# Altium PCB Weather PCB ROUTING.PcbDoc
Units mil, origin at the board's own origin, x right, y up, seen from the top; angles counter-clockwise.
Board outline 6000 x 4000 mil, 4 copper layers (Top Layer, GND1, GND2, Bottom Layer), stack 30.635 mil thick; 74 components, 33 nets, 230 pads, 115 vias.
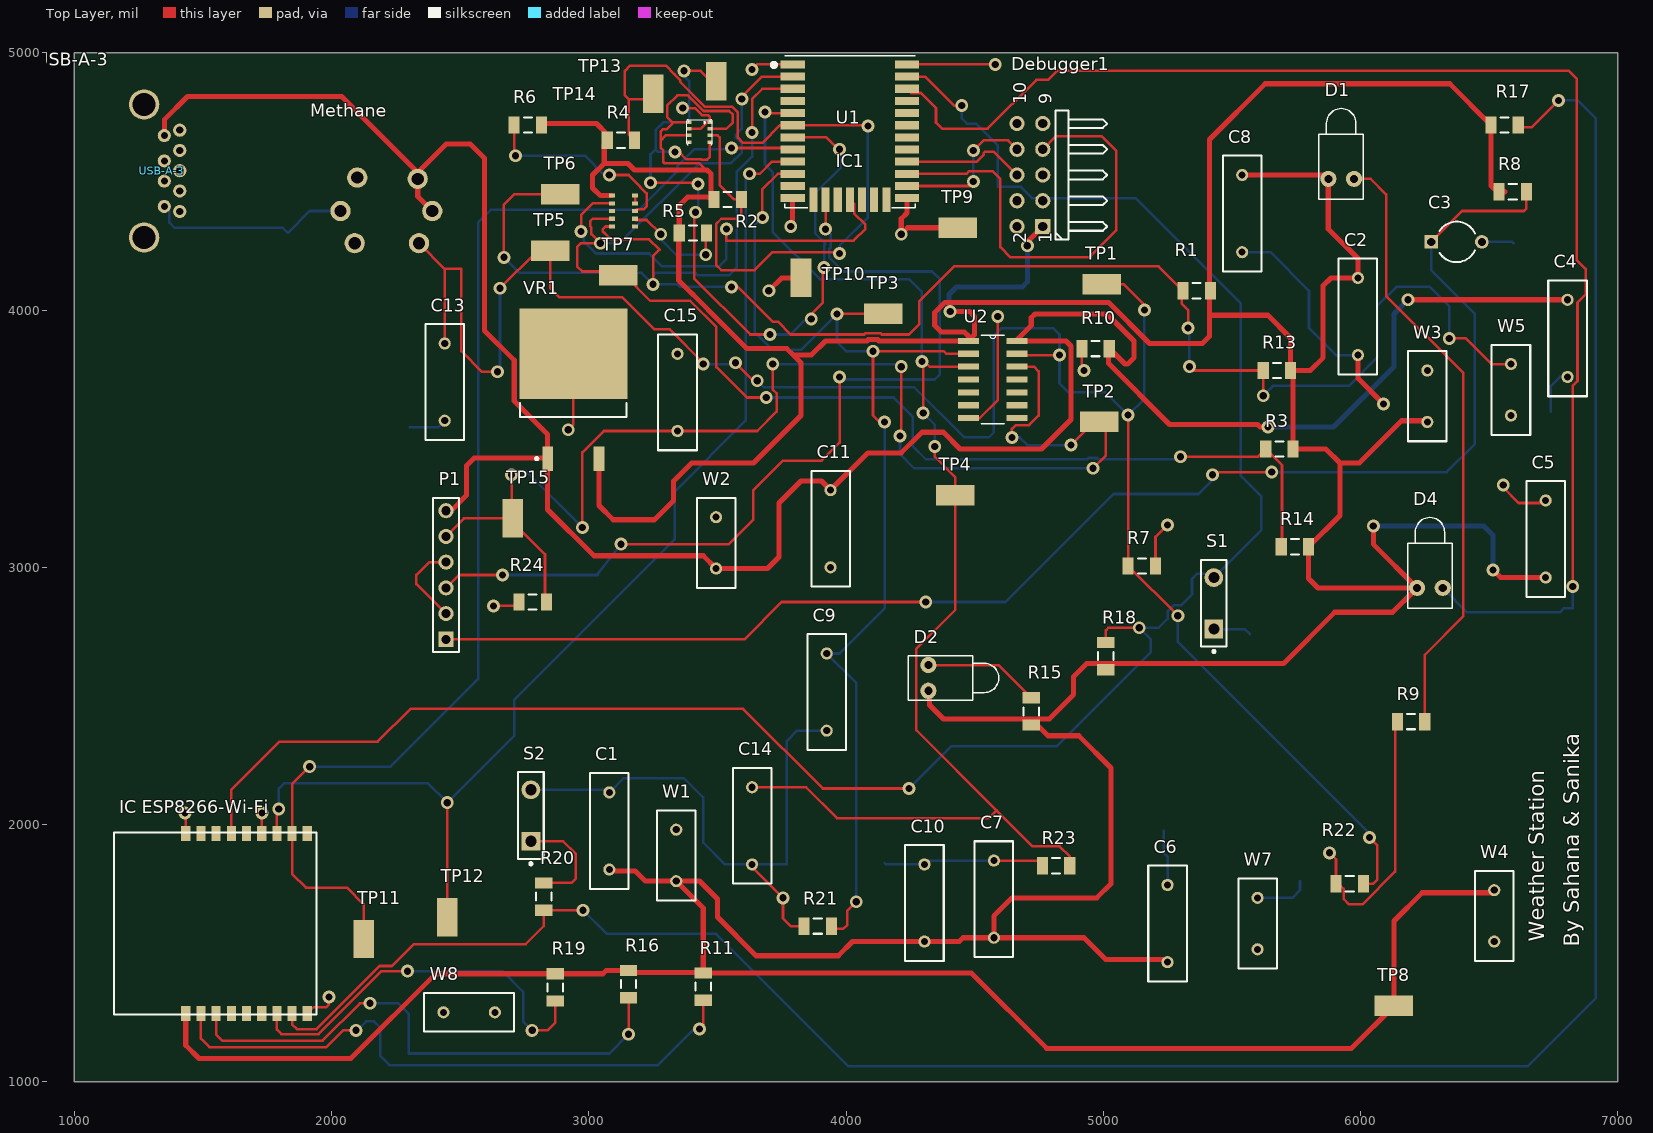
[diagram p0: Top Layer view]
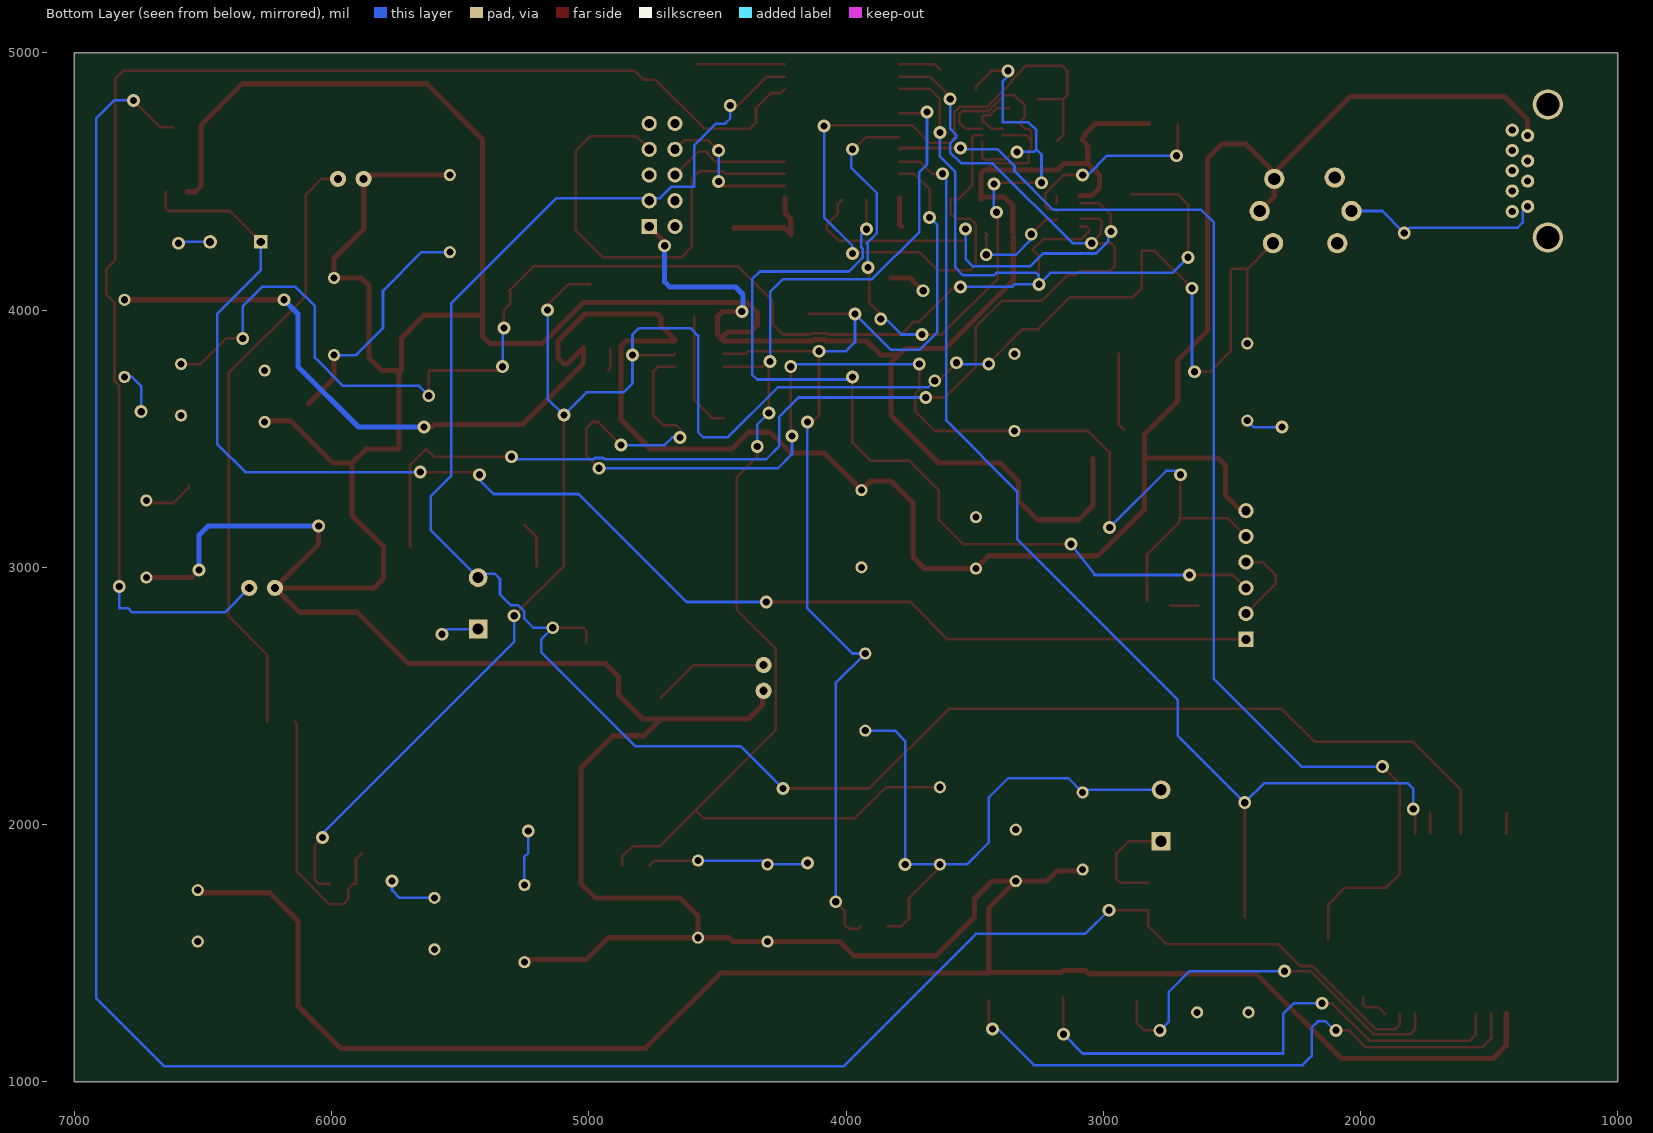
[diagram p1: Bottom Layer view, seen from below]
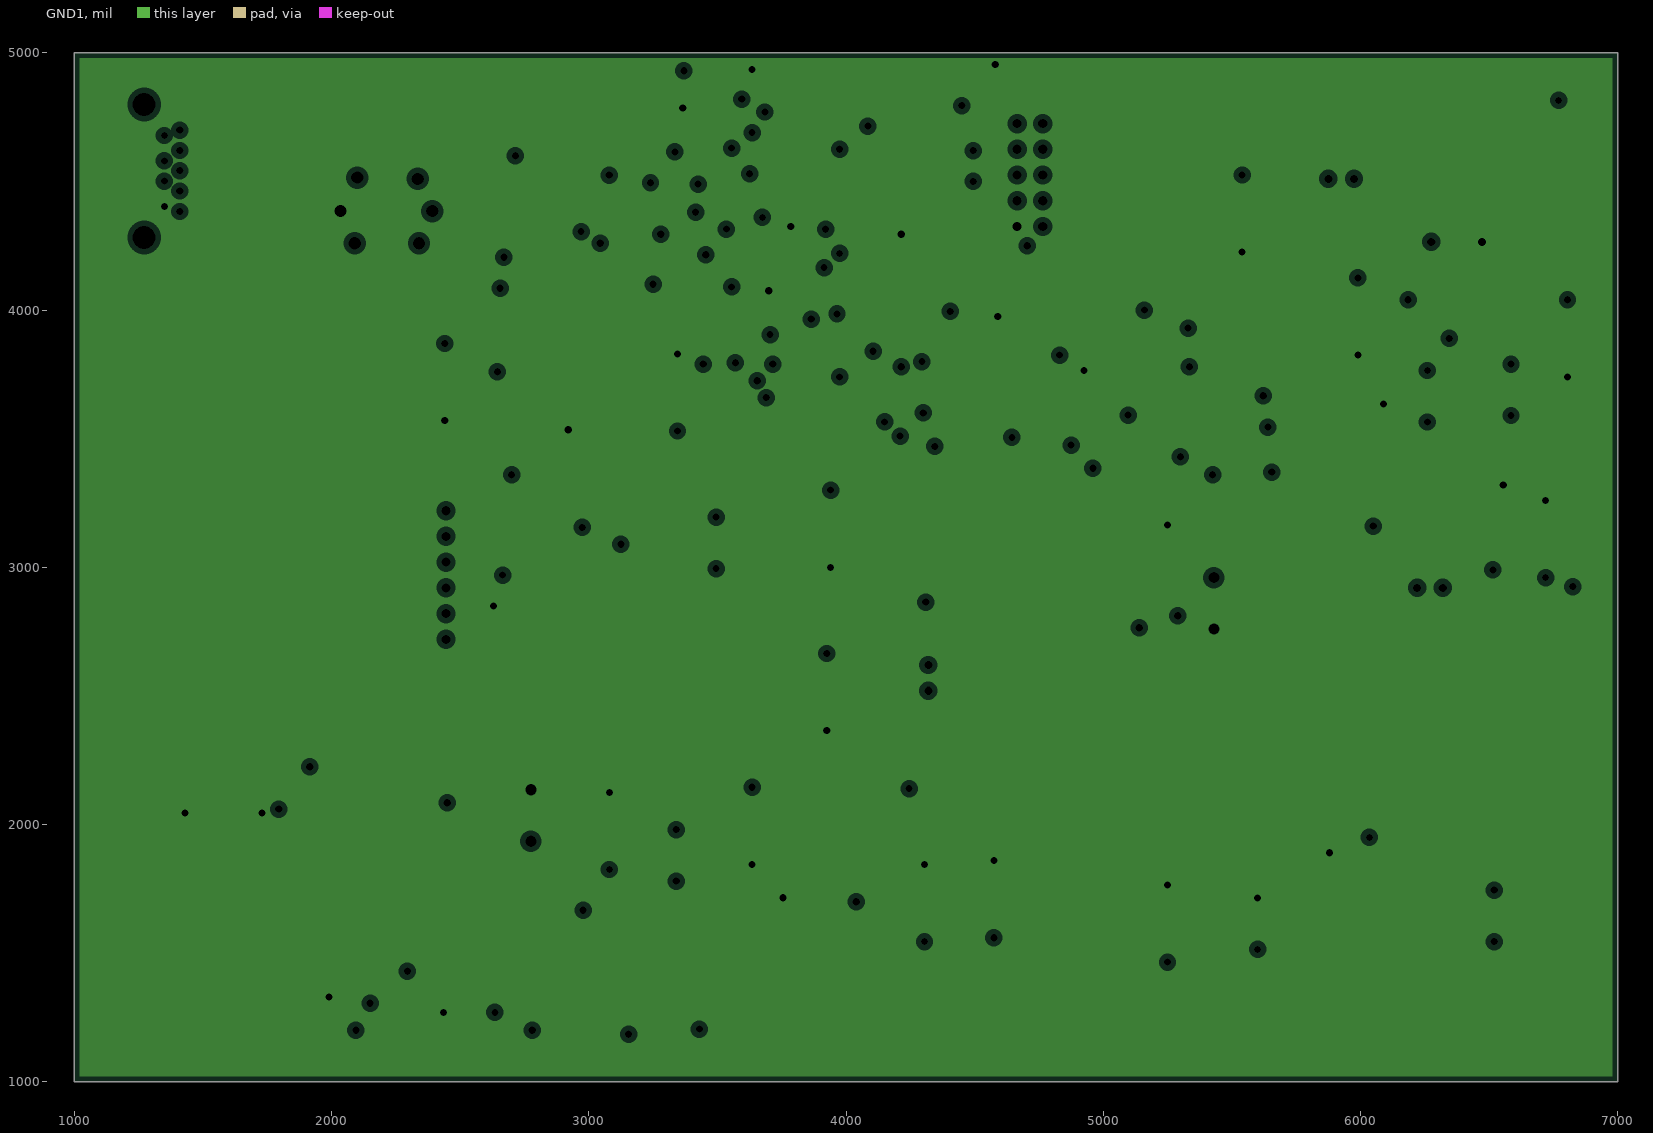
[diagram p2: GND1, clearances drawn from the general rule]
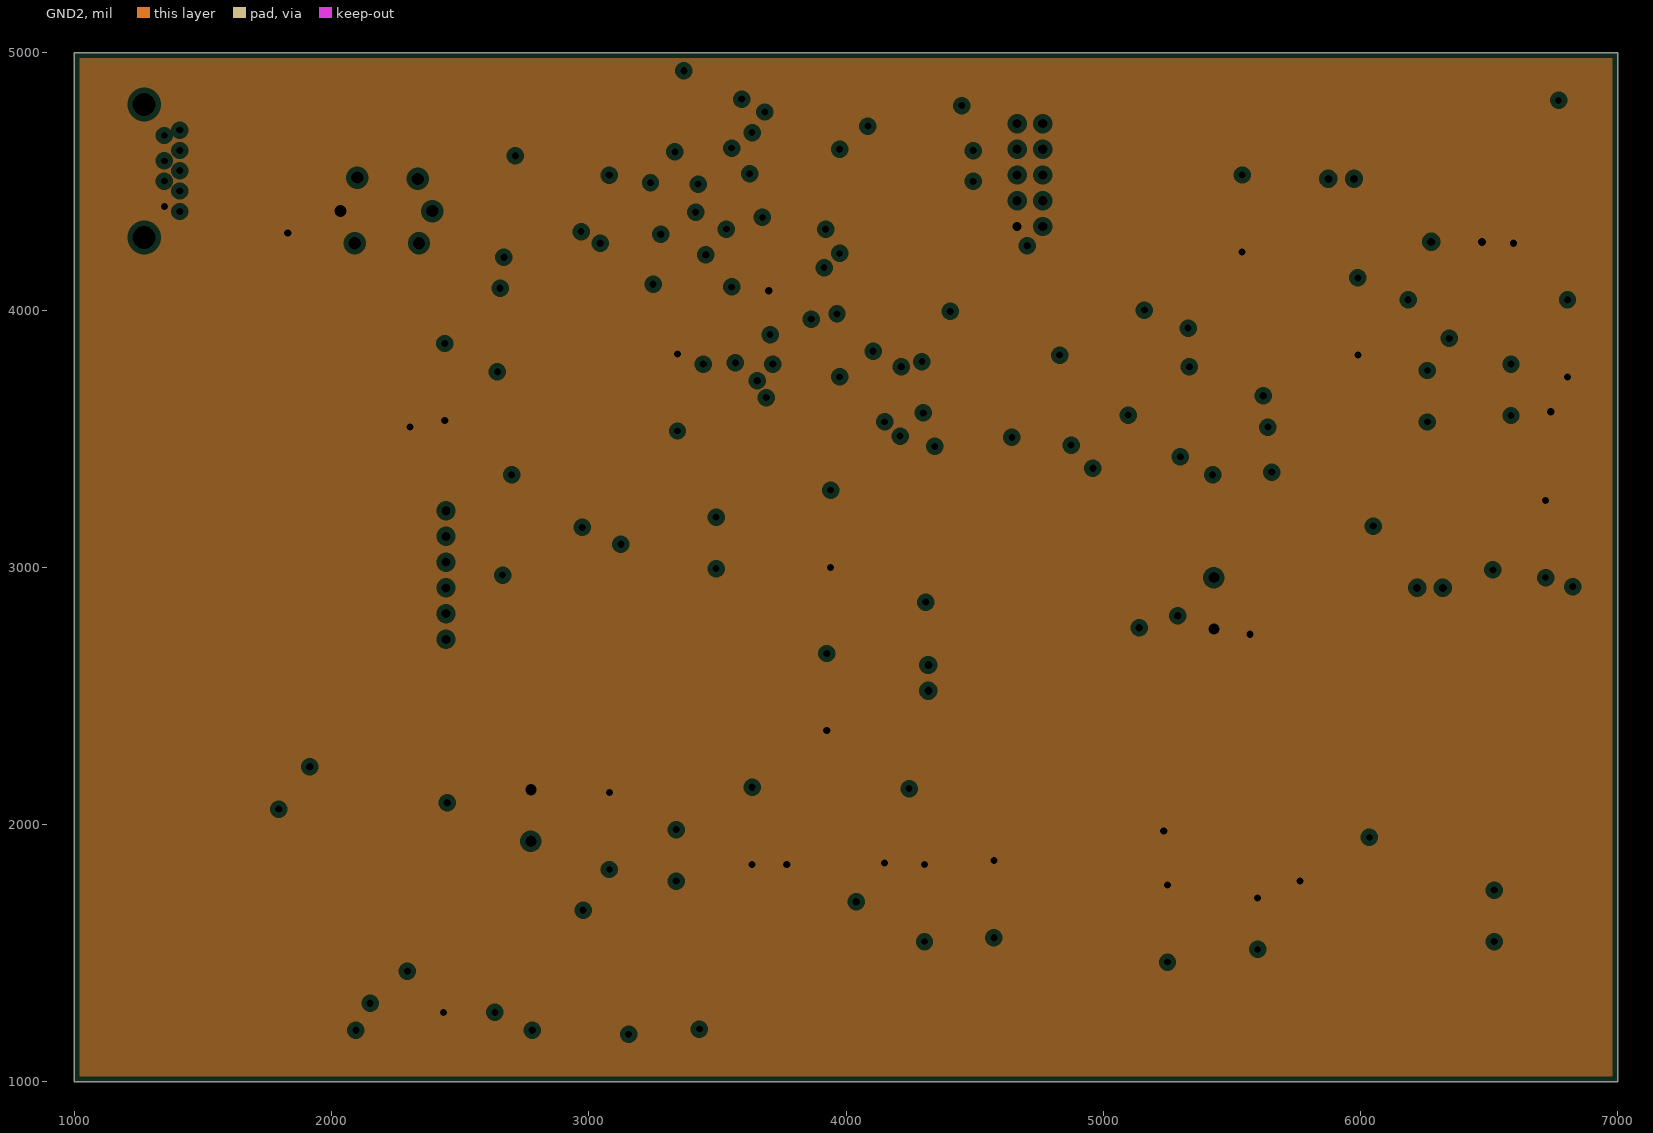
[diagram p3: GND2, clearances drawn from the general rule]

## Layer stack, top to bottom
Top Solder: solder mask 0.4, Solder Resist, Dk 3.5
Top Layer: signal copper 1.4
Dielectric 1: core 10, FR-4, Dk 4.2
GND1: plane copper 1.4173, net GND
Dielectric 3: prepreg 5, Dk 4.2
GND2: plane copper 1.4173, net GND
Dielectric 2: core 10, Dk 4.2
Bottom Layer: signal copper 1.4
Bottom Solder: solder mask 0.4, Solder Resist, Dk 3.5

## Board outline
1000,1000 7000,1000 7000,5000 1000,5000

## Design rules (kind name [scope] priority, off if disabled: settings)
Clearance [All And (Not InComponent('IC ESP8266-Wi-Fi'))] p1: gap=6 ignorepadtopadclearanceinfootprint=FALSE except(0: Arc-Hole Track-Hole SMDPad-Hole THPad-Hole Via-Hole Fill-Hole Poly-Hole Region-Hole Text-Hole; 15: Arc-Poly Track-Poly SMDPad-Poly THPad-Poly Via-Poly Fill-Poly Poly-Poly)
PlaneClearance [All] p1: clearance=20
PlaneConnect [All] p1: planeconnectstyle=Relief reliefexpansion=20 reliefentries=4 reliefconductorwidth=10 reliefairgap=10
PolygonConnect [All] p1: connectstyle=Relief reliefconductorwidth=10 reliefentries=4 polygonreliefangle="90 Angle" airgapwidth=10
RoutingVias [All] p1: holewidth=28 width=50 viastyle="Through Hole" minholewidth=28 minwidth=50 maxholewidth=28 maxwidth=50
SolderMaskExpansion [All] p1: expansion=4
Width Width_vbAT [InNet('VBAT') OR InNet('GND')] p1: maxlimit=25 minlimit=10 preferedwidth=20 minimp=50.000000 maximp=50.000000 favimp=50.000000
Width Width_1 [InNet('NetAir Quality_6')] p2: maxlimit=25 minlimit=10 preferedwidth=20 minimp=50.000000 maximp=50.000000 favimp=50.000000
Width [All] p3: maxlimit=20 minlimit=10 preferedwidth=10 minimp=50.000000 maximp=50.000000 favimp=50.000000
28 further rules are at their usual default settings.

## Components (designator, comment, footprint, x,y, rotation, side; value= is the part's Value field where it differs from the comment)
"Air Quality" "Air quality" AirQuality 3135,4385 r180 top
C1 "Cap" RAD-0.3 3080,1975 r270 top value=10uF
C2 "Cap" RAD-0.3 5990,3975 r90 top value=10uF
C3 "Cap2" CAPR5-4X5 6373.43,4265 r0 top value=220uF
C4 "Cap" RAD-0.3 6805,3890 r90 top value=10uF
C5 "Cap" RAD-0.3 6720,3110 r90 top value=10uF
C6 "Cap" RAD-0.3 5250,1615 r270 top value=0.1uF
C7 "Cap" RAD-0.3 4575,1710 r270 top value=10uF
C8 "Cap" RAD-0.3 5540,4375 r90 top value=10uF
C9 "Cap" RAD-0.3 3925,2515 r90 top value=10uF
C10 "Cap" RAD-0.3 4305,1695 r90 top value=0.1uF
C11 "Cap" RAD-0.3 3940,3150 r270 top value=100pF
C13 "Cap" RAD-0.3 2440,3720 r90 top value=10uF
C14 "Cap" RAD-0.3 3635,1995 r90 top value=10uF
C15 "Cap" RAD-0.3 3345,3680 r270 top value=10uF
D1 "LED1" LED-1 5925,4510 r90 top
D2 "LED1" LED-1 4320,2570 r0 top
D4 "LED1" LED-1 6270,2920 r90 top
Debugger1 "Header 5X2H" HDR2X5H 4765,4325 r90 top
IC1 "BME280" BME280 3430.35,4691.61 r90 top
"IC ESP8266-Wi-Fi" "ESP-WROOM-02" FRONT-FACE 1626.24,1615 r90 top
Methane "Methane Sensor" "Methane Sensor" 2215,4385 r0 top
P1 "Header 6" HDR1X6 2445,2720 r90 top
R1 "Res3" C1206 5363.15,4075 r0 top value=10K
R2 "Res3" C1206 3540,4430 r0 top value=10K
R3 "Res3" C1206 5685,3460 r0 top value=1K
R4 "Res3" C1206 3125,4660 r0 top value=10K
R5 "Res5" C1206 3405,4300 r180 top value=10K
R6 "Res3" C1206 2763.15,4720 r0 top value=10K
R7 "Res3" C1206 5150,3005 r180 top value=1K
R8 "Res3" C1206 6591.85,4460 r0 top value=150
R9 "Res3" C1206 6196.85,2400 r0 top value=10K
R10 "Res3" C1206 4970,3850 r0 top value=0
R11 "Res3" C1206 3445,1370 r90 top value=10K
R13 "Res3" C1206 5675,3765 r0 top value=5K
R14 "Res3" C1206 5745,3080 r0 top value=5K
R15 "Res3" C1206 4720,2440 r90 top value=1K
R16 "Res3" C1206 3155,1380 r90 top value=1K
R17 "Res3" C1206 6560,4720 r0 top value=10K
R18 "Res3" C1206 5010,2655 r270 top value=1K
R19 "Res3" C1206 2870,1366.85 r90 top value=1K
R20 "Res3" C1206 2825,1720 r90 top value=1K
R21 "Res3" C1206 3890,1605 r0 top value=1K
R22 "Res3" C1206 5958.15,1770 r0 top value=1K
R23 "Res3" C1206 4816.85,1840 r0 top value=1K
R24 "Res3" C1206 2781.85,2865 r0 top value=1K
S1 "SW-PB" SPST-2 5430,2860 r90 top
S2 "SW-PB" SPST-2 2775,2035 r90 top
TP1 "5019" TP380X203 4995,4100 r0 top
TP2 "5019" TP380X203 4985,3565 r0 top
TP3 "5019" TP380X203 4145,3985 r0 top
TP4 "5019" TP380X203 4425,3280 r0 top
TP5 "5019" TP380X203 2850,4230 r0 top
TP6 "5019" TP380X203 2890,4450 r0 top
TP7 "5019" TP380X203 3115,4135 r0 top
TP8 "5019" TP380X203 6130,1295 r0 top
TP9 "5019" TP380X203 4435,4320 r0 top
TP10 "5019" TP380X203 3825,4125 r90 top
TP11 "5019" TP380X203 2125,1555 r90 top
TP12 "5019" TP380X203 2450,1640 r90 top
TP13 "5019" TP380X203 3495,4890 r90 top
TP14 "5019" TP380X203 3250,4840 r90 top
TP15 "5019" TP380X203 2705,3190 r90 top
U1 "BGM111A256V1R" XCVR_BGM111A256V1R 4015,4695 r0 top
U2 "TXS0104EDR" SOIC127P600X175-14N 4665,3580 r0 top
USB-A-3 "USB-A-3" USB3 1350,4799.29 r270 top
VR1 "Volt Reg" D2PAK_N 2940,3690.24 r90 top
W1 "Jumper" RAD-0.2 3340,1880 r90 top
W2 "Jumper" RAD-0.2 3495,3095 r90 top
W3 "Jumper" RAD-0.2 6260,3665 r90 top
W4 "Jumper" RAD-0.2 6520,1645 r90 top
W5 "Jumper" RAD-0.2 6585,3690 r90 top
W7 "Jumper" RAD-0.2 5600,1615 r90 top
W8 "Jumper" RAD-0.2 2535,1270 r180 top

## Footprints (in the part's own frame and the unit in brackets; to place one, negate y for a bottom-side part, rotate by r counter-clockwise, add the part's x,y. Pads: shape width x height; smd on the part's side, far side on the other; paste and mask are expansions set on the pad)
AirQuality [mm] "LGA, 10-Leads, Body 2.70x4.10mmx1.10mm, Pitch 0.60mm"
  rect 0.6x0.4 smd: 1(-1.143,1.524) 2(-1.143,0.762) 3(-1.143,0) 4(-1.143,-0.762) 5(-1.143,-1.524) 6(1.143,-1.524) 7(1.143,-0.762) 8(1.143,0) 9(1.143,0.762) 10(1.143,1.524)
  body extent -1.35,-2.03 1.35,2.18, height 1.1
BME280 [mm]
  rect 0.35x0.5 smd: 1(0.975,-1.025) 2(0.325,-1.025) 3(-0.325,-1.025) 4(-0.975,-1.025) 5(-0.975,1.025) 6(-0.325,1.025) 7(0.325,1.025) 8(0.975,1.025)
  silkscreen extent -1.25,-1.25 1.25,1.25
C1206 [mm] "Chip Capacitor, Body 3.2x1.6mm, IPC High Density"
  rect 1.1x1.7 smd: 1(-1.35,0) 2(1.35,0)
  silkscreen extent -0.4,-0.75 0.4,0.75, body extent -1.7,-0.9 1.7,0.9, height 1.3
CAPR5-4X5 [mm] "Capacitor; 2 Leads"
  rect 1.35x1.35 hole 0.8: 1(-2.5,0)
  round 1.35 hole 0.8: 2(2.5,0)
  silkscreen extent -1.69,-2 1.82,2
D2PAK_N [mm] "D2-PAK, 4-Leads, Body 8.8x10.4mm, Pitch 2.54mm, Lead Span 15.1mm, IPC Medium Density"
  rect 2.4x1.05 smd: 1(-6.8,2.54) 3(-6.8,-2.54)
  rect 8.9x10.65 smd: 2(3.55,0)
  silkscreen extent -6.92,-5.25 -1.3,5.25, body extent -2.7,-5.28 6.3,5.28, height 4.69
FRONT-FACE [mm]
  rect 1.485x0.9 smd: 1(-8.892,4.9) 2(-8.892,3.4) 3(-8.892,1.9) 4(-8.892,0.4) 5(-8.892,-1.1) 6(-8.892,-2.6) 7(-8.892,-4.1) 8(-8.892,-5.6) 9(-8.892,-7.1) 10(8.892,-7.1) 11(8.892,-5.6) 12(8.892,-4.1) 13(8.892,-2.6) 14(8.892,-1.1) 15(8.892,0.4) 16(8.892,1.9) 17(8.892,3.4) 18(8.892,4.9)
  silkscreen extent -9,-8 9,12
HDR1X6 [mm] "Connector; Header; 6 Position"
  rect 1.5x1.5 hole 0.9: 1(0,0)
  round 1.5 hole 0.9: 2(2.54,0) 3(5.08,0) 4(7.62,0) 5(10.16,0) 6(12.7,0)
  silkscreen extent -1.27,-1.27 13.97,1.27
HDR2X5H [mm] "Connector; Header; 5x2 Position; Right Angle"
  rect 1.5x1.5 hole 0.9: 1(0,0)
  round 1.5 hole 0.9: 2(0,2.54) 3(2.54,0) 4(2.54,2.54) 5(5.08,0) 6(5.08,2.54) 7(7.62,0) 8(7.62,2.54) 9(10.16,0) 10(10.16,2.54)
  silkscreen extent -1.27,-6.35 11.43,-1.27
LED-1 [mm] "LED; 2 Leads"
  round 1.6 hole 0.8: 1(0,1.27) 2(0,-1.27)
  silkscreen extent -2,-2.2 6.95,2.2
"Methane Sensor" [mm]
  round 2 hole 1.2: 1(-2.921,3.302) 2(-4.572,0) 3(-3.175,-3.175) 4(3.175,-3.175) 5(4.49,0) 6(3.048,3.175)
RAD-0.2 [mm] "Radial Cap, Thru-Hole; 2 Leads; 0.2 in Pin Spacing"
  round 1.2 hole 0.7: 1(-2.54,0) 2(2.54,0)
  silkscreen extent -4.44,-1.91 4.44,1.91
RAD-0.3 [mm] "Radial Cap, Thru-Hole; 2 Leads; 0.3 in Pin Spacing"
  round 1.2 hole 0.7: 1(-3.81,0) 2(3.81,0)
  silkscreen extent -5.71,-1.91 5.71,1.91
SOIC127P600X175-14N [mil]
  rect 81x24 smd: 1(-189,300) 2(-189,250) 3(-189,200) 4(-189,150) 5(-189,100) 6(-189,50) 7(-189,0) 8(0,0) 9(0,50) 10(0,100) 11(0,150) 12(0,200) 13(0,250) 14(0,300)
  silkscreen extent -140,-22 -49,322
SPST-2 [mm] "Switch; 2 Leads"
  rect 1.85x1.85 hole 1.1: 1(-2.54,0)
  round 1.85 hole 1.1: 2(2.54,0)
  silkscreen extent -4.89,-1.27 4.28,1.27
TP380X203 [mm]
  rect 3.8x2.03 smd: 1(0,0)
USB3 [mm]
  round 1.3 hole 0.7: 1(3.07,0) 2(5.57,0) 3(7.57,0) 4(10.07,0) 5(2.54,1.524) 6(4.54,1.524) 7(6.54,1.524) 8(8.54,1.524) 9(10.57,1.524)
  round 3 hole 2.3: 10(0,-2) 15(13.14,-2)
XCVR_BGM111A256V1R [mm]
  rect 2.4x0.8 smd: 1(-5.65,6.6) 2(-5.65,5.4) 3(-5.65,4.2) 4(-5.65,3) 5(-5.65,1.8) 6(-5.65,0.6) 7(-5.65,-0.6) 8(-5.65,-1.8) 9(-5.65,-3) 10(-5.65,-4.2) 11(-5.65,-5.4) 12(-5.65,-6.6) 20(5.65,-6.6) 21(5.65,-5.4) 22(5.65,-4.2) 23(5.65,-3) 24(5.65,-1.8) 25(5.65,-0.6) 26(5.65,0.6) 27(5.65,1.8) 28(5.65,3) 29(5.65,4.2) 30(5.65,5.4) 31(5.65,6.6)
  rect 0.8x2.4 smd: 13(-3.6,-6.75) 14(-2.4,-6.75) 15(-1.2,-6.75) 16(0,-6.75) 17(1.2,-6.75) 18(2.4,-6.75) 19(3.6,-6.75)
  silkscreen extent -7.6,-7.55 6.45,7.45

## Part data
C1 C2 C3 C4 C5 C6 C7 C8 C9 C10 C11 C13 C14 C15: "Capacitor", Publisher="Altium Limited"
  C1 C2 C4 C5 C6 C7 C8 C9 C10 C11 C13 C14 C15: LatestRevisionDate=17-Jul-2002, LatestRevisionNote="Re-released for DXP Platform.", PackageDescription="Radial Cap, Thru-Hole; 2 Leads; 0.3 in Pin Spacing", PackageReference=RAD-0.3, Published=8-Jun-2000
  C3: PackageDescription="Capacitor; 2 Leads", PackageReference=CAPR5-4X5, Published=23-Sep-2002
D1 D2 D4: "Typical RED GaAs LED", LatestRevisionDate=08-Jul-2005, LatestRevisionNote="Mech Layer 1 removed.", PackageDescription="LED; 2 Leads", PackageReference=LED-1, Published=8-Jun-2000, Publisher="Altium Limited"
Debugger1: "Header, 5-Pin, Dual row, Right Angle", LatestRevisionDate=17-Jul-2002, LatestRevisionNote="Re-released for DXP Platform.", Publisher="Altium Limited"
IC1: "SENSOR PRESSURE HUMIDITY TEMP", Package="LGA-8 Bosch", Availability=Good, MF=Bosch, MP=BME280, Price="5.55 USD"
"IC ESP8266-Wi-Fi": "Wi-Fi Module w/ESP8266 802.11b/g/n 20dBm 20x18x3mm", Package="SMD-18 Espressif Systems", Availability=Good, MF="Espressif Systems", MP=ESP-WROOM-02, Price="3.39 USD", SnapEDA_Link=https://www.snapeda.com/symbols-footprints/ESP-WROOM-02/Espressif%20Systems/view-part/?ref=snap
Methane: library part "Dust Sensor"
P1: "Header, 6-Pin", LatestRevisionDate=17-Jul-2002, LatestRevisionNote="Re-released for DXP Platform.", Publisher="Altium Limited"
R1 R2 R3 R4 R6 R7 R8 R9 R10 R11 R13 R14 R15 R16 R17 R18 R19 R20 R21 R22 R23 R24: "Resistor", LatestRevisionDate=29-May-2009, LatestRevisionNote="IPC-7351 Footprint Added.", PackageDescription="Chip Resistor", PackageReference=J1-0603, Published=8-Jun-2000, Publisher="Altium Limited"
R5: library part Res3, "Resistor", LatestRevisionDate=29-May-2009, LatestRevisionNote="IPC-7351 Footprint Added.", PackageDescription="Chip Resistor", PackageReference=J1-0603, Published=8-Jun-2000, Publisher="Altium Limited"
S1 S2: "Switch", LatestRevisionDate=17-Jul-2002, LatestRevisionNote="Re-released for DXP Platform.", PackageDescription="Switch; 2 Leads", PackageReference=SPST-2, Published=24-Mar-1999, Publisher="Altium Limited"
TP1 TP2 TP3 TP4 TP5 TP6 TP7 TP8 TP9 TP10 TP11 TP12 TP13 TP14 TP15: "Phosphor Bronze Contact Miniature Silver Plated Surface Mount Test Points", Package="2010 Keystone", Availability=Good, MF=Keystone, MP=5019, Price="0.18 USD", SnapEDA_Link=https://www.snapeda.com/symbols-footprints/5019/Keystone%20Electronics/view-part/?ref=snap
U1: "Mod Blue Gecko 256k Flash 32qfn", Package="QFN-32 Silicon Labs", Availability=Unavailable, MF="Silicon Labs", MP=BGM111A256V1R, Price="6.69 USD"
U2: "4-Bit Bidirectional Voltage-Level Shifter for Open-Drain and Push-Pull Applications 14-SOIC -40 to 85", Package="SOIC-14 Texas Instruments", Availability=Unavailable, MF="Texas Instruments", MP=TXS0104EDR, Price=None, SnapEDA_Link=https://www.snapeda.com/symbols-footprints/TXS0104EDR/Texas%20Instruments/view-part/?ref=snap
VR1: "Voltage Regulator", LatestRevisionDate=29-May-2009, LatestRevisionNote="IPC-7351 Footprint Added.", PackageDescription="3-Pin Transistor Outline Package 2.54 mm Pitch, 15.1 mm Lead Span", PackageReference=D2PAK, Published=24-Mar-1999, Publisher="Altium Limited"
W1 W2 W3 W4 W5 W7 W8: "Jumper Wire", LatestRevisionDate=17-Jul-2002, LatestRevisionNote="Re-released for DXP Platform.", PackageDescription="Radial Cap, Thru-Hole; 2 Leads; 0.2 in Pin Spacing", PackageReference=RAD-0.2, Published=24-Mar-1999, Publisher="Altium Limited"

## Via types
v1: diameter 50, hole 28, Top Layer to Bottom Layer, 89 vias
v2: diameter 50, hole 28, Top Layer to GND1, 17 vias
v3: diameter 50, hole 28, GND2 to Bottom Layer, 9 vias

## Nets (pads, with @x,y where several pads share a name; then routed paths per layer and width w, separated by ;. In a path a pad name is that pad's centre, name@x,y a point inside that pad or via, vN(x,y) a via of type N, cw(c..) or ccw(c..) an arc to the next point about the centre after c; other vN are vias at no path point)
GND: "IC ESP8266-Wi-Fi.9" "IC ESP8266-Wi-Fi.13" "IC ESP8266-Wi-Fi.18" C1.1 C2.1 C3.2 C4.1 C5.2 C6.1 C7.1 C8.1 C9.1 C10.2 C11.2 C13.1 C14.1 C15.1 Debugger1.2 IC1.1 IC1.7 Methane.2 R7.1 R9.1 R10.1 R21.1 R22.1 R23.1 R24.1 S1.1 S2.2 TP9.1 TP10.1 U1.1 U1.12 U1.20 U1.31 U2.7 USB-A-3.4 VR1.2 W7.2 W8.2 | length 9730.8
  Top Layer w10: v2(1430,2045) 1433.32,2041.68 1433.32,1965.1 ; 1728.6,1965.1 1728.6,2043.6 v2(1730,2045) ; 1905.76,1264.9 1930.86,1290 1980,1290 1990,1300 v2(1990,1330) ; v2(2630,2850) R24.1@2740,2850 ; v2(2920,3535) 2940,3555 VR1.2 ; v2(3365,4785) 3412.37,4785 3439.37,4758 3463.42,4758 3470.71,4750.71 IC1.1 3460,4730 3434.41,4704.41 IC1.7 ; C14.1 3635,1835 v2(3755,1715) 3755,1635 3785,1605 R21.1 ; v2(3635,4935) 3654.84,4954.84 U1.1 ; U1.31 v2(4580.16,4954.84) ; U2.7 4520,3580 4590,3650 v2(4590,3975) ; C7.1 4743.7,1860 R23.1 ; R10.1 4916.85,3773.15 v2(4925,3765) ; R7.1 5203.15,3118.15 v2(5250,3165) ; v2(5880,1890) 5905,1865 R22.1 5915,1770 5935,1750 5935,1710 5955,1690 6007.63,1690 6135,1817.37 6135,2391.3 R9.1 ; v2(6555,3320) 6555,3310 6615,3250 6720,3250 C5.2
  Top Layer w20: v1(3700,4075) 3750,4125 TP10.1 ; v2(3785,4325) 3792.56,4332.56 U1.12 ; U1.20 4237.44,4377.44 4215,4355 v2(4215,4295) 4240,4320 TP9.1 ; C2.1 5990,3735 v2(6090,3635)
  Bottom Layer w10: USB-A-3.4 1369.41,4383.43 1369.41,4340.16 1389.57,4320 1810,4320 v3(1830,4300) 1915,4385 Methane.2 ; v3(2305,3545) 2415,3545 C13.1 ; S2.2 3070,2135 C1.1 3135,2180 3370,2180 3445,2105 3445,1930 3530,1845 C14.1 v3(3770,1845) 3770,2325 3810,2365 C9.1 ; v3(4150,1850) 4155,1845 C10.2 4320,1860 C7.1 ; v3(5235,1975) 5235,1890 5250,1875 C6.1 ; S1.1 5550,2760 v3(5570,2740) ; C8.1 5650,4225 5800,4075 5800,3930 5905,3825 C2.1 ; W7.2 5735,1715 5765,1745 v3(5765,1780) ; C3.2 6590,4265 v3(6595,4260) ; v3(6740,3605) 6740,3705 6775,3740 C4.1
GPIO: "Air Quality.7" U1.16 | length 1711.3
  Top Layer w10: v1(2970,4305) 2970,4370 3015,4415 3090,4415 ; v1(3535,4315) 3535,4270 4030,4270 4075,4315 4075,4332.29 4031.5,4375.79 4031.5,4412.76 U1.16
  Bottom Layer w10: v1(2970,4305) 2980,4295 2980,4268.43 3028.43,4220 3235,4220 3285,4170 3506.72,4170 3535,4198.28 v1(3535,4315)
GPIO0: "IC ESP8266-Wi-Fi.8" R17.2 R20.1 | length 9503.6
  Top Layer w10: 1846.71,1264.9 1846.71,1223.29 1865,1205 1941.72,1205 2186.72,1450 2235,1450 2320,1535 2755,1535 2825,1605 R20.1 v1(2978.15,1666.85) ; R17.2@6615,4710 6665,4710 v1(6770,4815)
  Bottom Layer w10: v1(2978.15,1666.85) 3070,1575 3495,1575 4010,1060 6650,1060 6915,1325 6915,4745 6845,4815 v1(6770,4815) v1@6765,4815
LED: P1.3 U1.14 | length 3570.7
  Top Layer w10: P1.3 2495,2970 v1(2665,2970) ; v1(3125,3090) 3545,3090 3640,3185 3640,3300 3755,3415 3905,3415 3975,3485 v1(3975,3740) ; v1(3920.51,4314.49) U1.14
  Bottom Layer w10: v1(2665,2970) 3035,2970 3035,2975 v1(3125,3090) ; v1(3920.51,4314.49) 3940,4295 3940,4243.28 3935,4238.28 3935,4203.43 3988.43,4150 4335,4150 4365,4120 4365,3750 4345,3730 3985,3730 v1(3975,3740)
LED_GND: P1.2 P1.4 | length 333.3
  Top Layer w10: P1.2 2330,2935 2330,2970 2380,3020 P1.4
"LS 3V": C9.2 R21.2 TP3.1 U1.10 U2.2 | length 4462.3
  Top Layer w10: v1(3675,4360) 3675,4470 3734.65,4529.65 U1.10 ; R21.2 3953.15,1595 3990,1595 4005,1610 4005,1665 v1(4040,1700) ; v1(3965,3985) TP3.1 ; v1(4150,3565) 4140,3555 4105,3590 v1(4105,3840) 4380,3840 4390,3830 U2.2
  Bottom Layer w10: v1(3675,4360) 3645,4330 3645,3914.09 3714.09,3845 3825,3845 v1(3965,3985) 3965,3875 4000,3840 v1(4105,3840) ; v1(4040,1700) 4040,2550 C9.2 3975,2665 4150,2840 v1(4150,3565)
"LS 3V Dust": C14.2 R23.2 TP4.1 U1.5 U2.3 | length 5121.6
  Top Layer w10: C14.2 3845,2145 3965,2025 4555,2025 4585,2055 ; v1(3685,4770) 3689.13,4765.87 U1.5 ; v1(4300,3600) 4300,3795 v1(4295,3800) 4305,3800 4325,3780 U2.3 ; v1(4345,3470) 4345,3430 4425,3350 TP4.1 4425,2835 4273.5,2683.5 4273.5,2366.5 4585,2055 ; R23.2 4870,1875 4830,1915 4725,1915 4585,2055
  Bottom Layer w10: v1(3685,4770) 3685,4566.57 3715,4536.57 3715,4303.43 3898.43,4120 4245,4120 4295,4070 v1(4295,3800) ; v1(4300,3600) 4345,3555 v1(4345,3470)
"LS 5V": C13.2 Methane.4 R7.2 R22.2 TP1.1 TP5.1 U2.13 | length 7981.4
  Top Layer w10: Methane.4 2440,4160 ; C13.2 2440,4160 ; v1(2645,3760) 2585,3760 2505,3840 2505,4160 2440,4160 ; v1(2655,4085) 2800,4230 TP5.1 2850,4085 2885,4050 3130,4050 3255,3925 3315,3925 3445,3795 v1(3445,3790) ; v1(3570,3795) 3640,3725 v1(3655,3725) ; U2.13 4670,3825 v1(4830,3825) v1@4835,3830 ; TP1.1 5080,4100 5160,4020 v1(5160,4000) ; v1(5096.85,3591.85) R7.2 v1(5290,2811.85) ; R22.2@6006.3,1765 R22.2 6050,1770 6065,1785 6065,1920 v1(6035,1950)
  Bottom Layer w10: v1(2645,3760) 2655,3750 v1(2655,4085) ; v1(3445,3790) 3565,3790 v1(3570,3795) ; v1(3655,3725) 3680,3700 4265,3700 4460,3505 4555,3505 4575,3525 4575,3900 4605,3930 4805,3930 4830,3905 v1(4830,3825) 4830,3715 4865,3680 5008.7,3680 v1(5096.85,3591.85) 5160,3655 v1(5160,4000) ; v1(5290,2811.85) 5290,2710 6035,1965 v1(6035,1950)
"LS 5V Dust": C15.2 P1.5 R24.2 TP2.1 TP15.1 U2.12 | length 5149.4
  Top Layer w10: P1.5 2515,3190 TP15.1 ; v1(2700,3360) 2700,3195 TP15.1 ; R24.2@2830,2870 2830,3050 2705,3175 TP15.1 ; v1(2975,3155) 2975,3446.65 3058.35,3530 C15.2 3655,3530 3730,3605 3730,3676.57 3715,3691.57 v1(3715,3790) ; v1(4210,3510) 4215,3515 v1(4215,3780) ; v1(4645,3505) 4645,3538 4660,3553 4711.71,3553 4748.71,3590 4748.71,3761.29 4730,3780 U2.12 ; v1(4875,3475) 4965,3565 TP2.1 5010,3540 5010,3435 v1(4960,3385)
  Bottom Layer w10: v1(2700,3360) 2715,3375 2755,3375 v1(2975,3155) ; v1(3715,3790) 4205,3790 v1(4215,3780) ; v1(4210,3510) 4210,3440 4265,3385 v1(4960,3385) ; v1(4645,3505) 4675,3505 4705,3475 v1(4875,3475)
"NetAir Quality_2": "Air Quality.2" R5.1 | length 435.2
  Top Layer w10: 3180,4355 3185,4350 3225,4350 v1(3280,4295) ; v1(3455,4215) 3455,4286.85 3450,4291.85 R5.1
  Bottom Layer w10: v1(3280,4295) 3280,4275 3340,4215 v1(3455,4215)
"NetAir Quality_3": "Air Quality.3" R6.1 | length 799.4
  Top Layer w10: R6.1 2710,4600 v1(2715,4600) ; v1(3080,4525) 3155,4525 3200,4480 3200,4478.43 3225,4453.43 3225,4403.24 3213.88,4392.13 3187.13,4392.13 3180,4385
  Bottom Layer w10: v1(2715,4600) 2985,4600 3060,4525 v1(3080,4525)
"NetAir Quality_4": "Air Quality.4" "Air Quality.5" | length 30
  Top Layer w10: 3180,4415 3180,4445
"NetAir Quality_6": "Air Quality.6" "IC ESP8266-Wi-Fi.1" C1.2 C2.2 C5.1 C6.2 C7.2 C8.2 C10.1 D1.1 D2.2 D4.1 Debugger1.1 IC1.2 IC1.6 IC1.8 R1.2 R2.1 R3.2 R4.1 R5.2 R6.2 R8.1 R11.2 R13.2 R14.2 R15.1 R16.2 R17.1 R18.2 R19.2 TP8.1 U2.1 VR1.3 W1.1 W3.1 W4.2 | length 27099.4
  Top Layer w10: IC1.6 3298.82,4678.82 3280,4660 ; IC1.8 3325,4730 ; 3455,4545 3430,4570 3295,4570 3290,4575 3290,4620 3280,4630 3280,4660 ; IC1.2 3534.41,4704.41 3560,4730 3560,4760 3546,4774 3446,4774 3385,4835 3345,4835 3305,4795 3305,4750 3325,4730 ; 3280,4660 3280,4695 3287.5,4702.5 3302.5,4702.5 3325,4725 3325,4730
  Top Layer w20: 1433.32,1264.9 1433.32,1141.68 1485,1090 2075,1090 2405,1420 R19.2 3055,1420 3068.15,1433.15 R16.2 3163.15,1425 3445,1425 3445,1675 W1.1 ; R6.2@2825,4725 3030.47,4725 3071.85,4683.62 3071.85,4676.3 3080,4668.15 3080,4660 3060,4640 3060,4570 ; VR1.3 3040,3240 3095,3185 3255,3185 3330,3260 3330,3335 3400,3405 3640,3405 3825,3590 3825,3795 3795,3825 ; C1.2 3085,1820 3180,1820 3220,1780 W1.1 ; 3090,4445 3045,4445 3015,4475 3015,4525 3060,4570 ; R5.2@3350,4283.64 3350,4115 3403.75,4061.25 3404.11,4061.25 3521.25,3944.11 3521.25,3943.75 3615,3850 3770,3850 3795,3825 ; R5.2 3351.85,4406.85 3385,4440 3464.16,4440 3474.16,4430 3475,4430 3475,4530 3460,4545 3455,4545 3177.5,4545 3152.5,4570 3060,4570 ; R11.2 4486.85,1423.15 4780,1130 5965,1130 TP8.1 6130,1625 6240,1735 6510,1735 W4.2 ; D2.2 4325,2515 4325,2465 4379.53,2410.47 4720,2410.47 ; v1(4405,3995) 4480,3995 4500,3975 4500,3904 U2.1 ; v1(4705,4250) 4705,4265 Debugger1.1 ; C6.2 5240,1475 5010,1475 4925,1560 C7.2 ; C8.2 5860,4525 D1.1 5875,4315 5990,4200 C2.2 5885,4125 5855,4095 5855,3815 5805,3765 R13.2 ; v1(6050,3160) 6050,3090 D4.1 D4.1@6210,2920 ; W3.1 6255,3570 6160,3570 5995,3405 5920,3405 ; v1(6515,2990) 6515,2985 6520,2985 6545,2960 C5.1 ; 6562.32,4460 6530,4460 6506.85,4483.15 R17.1 6346.85,4880 5630,4880 5413.15,4663.15 5413.15,3980 ; W1.1 3430,1780 3500,1710 3500,1640 3650,1490 3970,1490 4025,1545 C10.1 4440,1545 4455,1560 C7.2 ; 3795,3825 3865,3825 3920,3880 4081.36,3880 4086.36,3885 4123.64,3885 4128.64,3880 U2.1 ; U2.1 4476,3899 4460,3915 4370,3915 4345,3940 4345,3990 4385,4030 5020,4030 5180,3870 5385,3870 5413.15,3898.15 5413.15,3980 ; C7.2 4575,1645 4645,1715 4975,1715 5030,1770 5030,2220 4905,2345 4785.47,2345 4720,2410.47 ; 4720,2410.47 4790.47,2410.47 4885,2505 4885,2575 4935.47,2625.47 5700.47,2625.47 5900,2825 6125,2825 6210,2910 D4.1@6210,2920 ; 5413.15,3980 5640,3980 5728.15,3891.85 R13.2 ; R13.2 5738.15,3755 R3.2 5865,3460 5920,3405 ; 5920,3405 5920,3201.85 R14.2 5798.15,2956.85 5835,2920 D4.1@6210,2920
  Bottom Layer w20: v1(4405,3995) 4400,4000 4400,4060 4430,4090 4685,4090 4705,4110 v1(4705,4250) ; v1(6050,3160) 6480,3160 6515,3125 v1(6515,2990)
"NetAir Quality_9": "Air Quality.9" R3.1 R14.1 TP7.1 U1.2 | length 5102
  Top Layer w10: 3090,4355 3015,4355 3005,4345 3005,4326.57 3010,4321.57 3010,4295 v1(3045,4260) 2970,4260 2955,4245 2955,4170 2975,4150 3095,4150 3110,4135 TP7.1 3140,4135 3238.75,4036.25 3393.75,4036.25 3496.25,3933.75 3496.25,3778.75 3615,3660 v1(3690,3660) ; v1(3595,4820) 3590,4825 3672.6,4907.6 U1.2 ; v1(5300,3430) 5601.85,3430 R3.1 5695,3396.85 5695,3083.15 R14.1
  Bottom Layer w10: v1(3045,4260) 3120,4260 3430,4570 3551.57,4570 3595,4613.43 3595,4646.57 3571.57,4670 3571.57,4681.57 3595,4705 v1(3595,4820) ; v1(3690,3660) 4185,3660 4260,3585 4260,3470 4310,3420 4938.43,3420 4943.43,3425 4976.57,3425 4981.57,3420 5290,3420 v1(5300,3430)
"NetAir Quality_10": "Air Quality.10" R1.1 R13.1 TP6.1 U1.3 W5.2 | length 7252.2
  Top Layer w10: v1(2670,4205) 2670,4410 2710,4450 TP6.1 ; 3090,4325 3065,4325 3055,4315 3055,4305 3060,4300 3061.57,4300 3086.57,4275 3235,4275 3275,4235 3250,4210 v1(3250,4100) ; v1(3555,4090) 3580,4090 3715.04,3954.96 3735.04,3954.96 3785,3905 4071.01,3905 4076.01,3910 4133.99,3910 4138.99,3905 4245,3905 4285,3945 4285,4035 4420,4170 5215,4170 R1.1 5305,4070 5305,4025 5330,4000 v1(5330,3930) ; v1(3635,4690) 3635,4820 3675.35,4860.35 U1.3 ; v1(5335,3780) 5350,3765 R13.1 v1(5621.85,3666.85) ; v1(6345,3890) 6410,3890 6510,3790 W5.2
  Bottom Layer w10: v1(2670,4205) 2730,4145 3205,4145 v1(3250,4100) ; v1(3555,4090) 3355,4090 3345,4100 v1(3250,4100) ; v1(3635,4690) 3635,4596.57 3575,4536.57 3575,4165 3545,4135 3425.15,4135 3415.15,4145 3260,4145 3250,4135 v1(3250,4100) ; v1(5330,3930) 5320,3920 5335,3905 v1(5335,3780) ; v1(5621.85,3666.85) 5660,3705 5955,3705 6065,3815 6065,4015 6140,4090 6270,4090 6345,4015 v1(6345,3890)
NetD1_2: D1.2 R9.2 | length 2386.2
  Top Layer w10: D1.2 6040,4510 6100,4450 6100,4055 6400,3755 6400,2810 6250,2660 R9.2
NetD2_1: D2.1 R15.2 | length 452.5
  Top Layer w10: D2.1 4593.15,2620 R15.2
NetD4_2: D4.2 U1.29 | length 5451.3
  Top Layer w10: U1.29 4253.94,4843.86 4290.9,4843.86 4350,4784.76 4350,4728.43 4373.43,4705 4550,4705 4740,4895 4785,4895 4820,4930 6810,4930 6840,4900 6840,4195 6875,4160 6875,4060 6843.62,4028.62 6843.62,3724 6825,3705.38 v1(6825,2925)
  Bottom Layer w10: D4.2 6415,2825 6775,2825 6790,2840 6825,2840 v1(6825,2925)
NetDebugger1_6: Debugger1.6 U1.23 | length 484.5
  Top Layer w10: U1.23 4508.46,4576.89 4535,4603.43 4535,4610 4540,4615 4575,4615 Debugger1.6
NetDebugger1_7: Debugger1.7 U1.22 | length 1792.4
  Top Layer w10: U1.22 4468.08,4529.65 4478.43,4540 4569.29,4540 4600,4509.29 4600,4245 4640,4205 4945,4205 5050,4310 5050,4620 4995,4675 4815,4675 Debugger1.7
NetDebugger1_8: Debugger1.8 U1.21 | length 585.9
  Top Layer w10: U1.21 4477.4,4482.4 v1(4495,4500) ; v1(4495,4620) 4535,4660 4630,4660 Debugger1.8
  Bottom Layer w10: v1(4495,4500) v1(4495,4620)
NetIC1_3: IC1.3 R2.2 R4.2 TP14.1 U1.6 | length 3279.8
  Top Layer w10: R4.2 3155,4683.15 3155,4820 ; TP14.1@3255,4820 3155,4820 ; IC1.3 3501.18,4678.82 3510,4670 3510,4485 3565,4430 R2.2 3593.15,4373.15 3575,4355 3515,4355 3495,4335 3495,4175 3515,4155 3645,4155 3715,4225 3970,4225 v1(3975,4220) ; v1(4085,4715) 4081.38,4718.62 U1.6 3743.62,4718.62 3675,4650 3600,4650 3580,4670 3580,4768.28 3558.28,4790 3452.63,4790 3355.09,4887.54 3355.09,4894 3334,4915.09 3334,4916 3300,4950 3160,4950 3140,4930 3140,4835 3155,4820
  Bottom Layer w10: v1(3975,4220) 3975,4250 4085,4360 v1(4085,4715)
NetIC1_4: IC1.4 TP13.1 U1.7 | length 3091.4
  Top Layer w10: v1(3240,4495) 3420,4495 v1(3425,4490) ; v1(3335,4615) 3350,4615 3379,4586 3436.63,4586 3437.63,4585 3460,4585 3470.71,4595.71 IC1.4 ; v1(3370,4930) 3435,4930 3495,4870 TP13.1@3495,4855.98 ; v1(3415,4380) 3410,4375 3410,4123.43 3628.43,3905 v1(3705,3905) ; U1.7 3923.62,4671.38 3970,4625 v1(3975,4625) ; v1(3865,3965) 3865,3985 3910,4030 3910,4160 v1(3915,4165)
  Bottom Layer w10: v1(3240,4495) 3240,4605 3260,4625 ; v1(3335,4615) 3270,4615 3260,4625 ; v1(3370,4930) 3370,4910 3390,4890 3390,4730 3290,4730 3260,4700 3260,4625 ; v1(3415,4380) 3425,4390 v1(3425,4490) ; v1(3705,3905) 3785,3905 3845,3965 v1(3865,3965) ; v1(3915,4165) 3915,4253.43 3920,4258.43 3880.51,4297.92 3880.51,4455.51 3980,4555 3980,4620 v1(3975,4625)
"NetIC ESP8266-Wi-Fi_2": "IC ESP8266-Wi-Fi.2" R11.1 | length 2400.7
  Top Layer w10: 1492.38,1264.9 1492.38,1167.62 1525,1135 1980,1135 2045,1200 v1(2095,1200) ; v1(3430,1205) 3445,1220 R11.1
  Bottom Layer w10: v1(2095,1200) 2100,1200 2135,1235 2165,1235 2190,1210 2190,1100 2225,1065 3270,1065 3410,1205 v1(3430,1205)
"NetIC ESP8266-Wi-Fi_3": "IC ESP8266-Wi-Fi.3" R16.1 | length 2099.2
  Top Layer w10: 1551.43,1264.9 1551.43,1183.57 1575,1160 1965,1160 2110,1305 v1(2150,1305) ; v1(3155,1185) R16.1
  Bottom Layer w10: v1(2150,1305) 2260,1305 2300,1265 2300,1110 3080,1110 v1(3155,1185)
"NetIC ESP8266-Wi-Fi_6": "IC ESP8266-Wi-Fi.6"
"NetIC ESP8266-Wi-Fi_7": "IC ESP8266-Wi-Fi.7" R19.1 | length 1512.3
  Top Layer w10: 1787.65,1264.9 1787.65,1202.35 1805,1185 1950,1185 2195,1430 v1(2295,1430) ; v1(2780,1200) 2840,1200 2870,1230 R19.1
  Bottom Layer w10: v1(2295,1430) 2665,1430 2745,1350 2745,1235 v1(2780,1200)
"NetIC ESP8266-Wi-Fi_11": "IC ESP8266-Wi-Fi.11" TP11.1 U1.8 | length 4834.9
  Top Layer w10: v1(1915,2225) 1846.71,2156.71 1846.71,1965.1 1846.71,1808.29 1900,1755 2060,1755 2125,1690 TP11.1 ; v1(3555,4630) 3786.69,4630 U1.8
  Bottom Layer w10: v1(1915,2225) 2230,2225 2570,2565 2570,4340 2620,4390 3195,4390 3345,4540 3345,4560 3410,4625 3550,4625 v1(3555,4630)
"NetIC ESP8266-Wi-Fi_12": "IC ESP8266-Wi-Fi.12" TP12.1 U1.9 | length 4436
  Top Layer w10: 1787.65,1965.1 1787.65,2052.65 v1(1795,2060) ; TP12.1 v1(2450,2085) ; v1(3625,4530) 3665,4530 3711.89,4576.89 U1.9
  Bottom Layer w10: v1(1795,2060) 1795,2140 1815,2160 2375,2160 v1(2450,2085) 2710,2345 2710,2485 3335,3110 3335,3295 3610,3570 3610,4515 v1(3625,4530)
NetR20_2: R20.2 S2.1 | length 422.7
  Top Layer w10: S2.1 2900,1935 2950,1885 2950,1790 2933.15,1773.15 R20.2
R18: "IC ESP8266-Wi-Fi.15" Debugger1.3 R18.1 S1.2 U1.30 | length 7914.1
  Top Layer w10: 1610.49,1965.1 1610.49,2135.49 1796.9,2321.9 2179.57,2321.9 2307.66,2450 3600,2450 3910,2140 v1(4245,2140) ; U1.30 4307.6,4907.6 4325.2,4890 4325.2,4889.8 4420,4795 v1(4450,4795) ; R18.1 5010,2755 5020,2765 v1(5140,2765)
  Bottom Layer w10: v1(4245,2140) 4410,2305 4820,2305 5185,2670 5185,2720 v1(5140,2765) 5215,2765 5250,2800 5250,2828.42 5273.43,2851.85 5301.85,2851.85 5345,2895 5345,2955 5365,2975 5415,2975 S1.2 5615,3145 5615,3275 5535,3355 5535,4025 5125,4435 4722.97,4435 4678.44,4479.53 4590,4479.53 4590,4640 4505,4725 4470,4725 4450,4745 v1(4450,4795)
V-LED: C3.1 P1.1 R8.2 | length 5670.8
  Top Layer w10: P1.1 3605,2720 3750,2865 v1(4310,2865) ; v1(5425,3360) 5435,3370 v1(5655,3370) ; C3.1 6395,4385 6635,4385 6645,4395 R8.2
  Bottom Layer w10: v1(4310,2865) 4620,2865 5040,3285 5370,3285 5425,3340 v1(5425,3360) ; v1(5655,3370) 6335,3370 6445,3480 6445,3985 6275,4155 C3.1
VBAT: C4.2 C11.1 Methane.5 Methane.6 P1.6 R10.2 U2.14 USB-A-3.1 VR1.1 W2.1 | length 9840.9
  Top Layer w20: USB-A-3.1 1350,4740 1440,4830 2040,4830 Methane.6@2335,4535 ; Methane.5 2335,4441.78 Methane.6 Methane.6@2335,4535 ; P1.6 2465,3220 2525,3280 2525,3395 2555,3425 VR1.1@2840,3425 ; v1(5640,3545) 5610,3545 5600,3555 5258.15,3555 5020,3793.15 5020,3855 5085,3790 5095,3790 5120,3815 5120,3880 5015,3985 4735,3985 4720,3970 4720,3940 4665,3885 U2.14 4855,3880 4875,3860 4875,3575 4760,3460 4443.64,3460 4378.64,3525 4295,3525 4215,3445 4085,3445 C11.1 3905,3335 3825,3335 3740,3250 3740,3040 3695,2995 W2.1 3445,3045 3020,3045 2840,3225 VR1.1 VR1.1@2840,3425 ; v1(6185,4040) C4.2 ; Methane.6@2335,4535 2445,4645 2540,4645 2595,4590 2595,3920 2710.35,3804.65 2710.35,3646.52 2840,3516.87 VR1.1@2840,3425
  Bottom Layer w20: v1(5640,3545) 5895,3545 6130,3780 6130,3985 v1(6185,4040)
pads on no net: "Air Quality.1" "Air Quality.8" "IC ESP8266-Wi-Fi.4" "IC ESP8266-Wi-Fi.5" "IC ESP8266-Wi-Fi.10" "IC ESP8266-Wi-Fi.14" "IC ESP8266-Wi-Fi.16" "IC ESP8266-Wi-Fi.17" Debugger1.4 Debugger1.5 Debugger1.9 Debugger1.10 IC1.5 Methane.1 Methane.3 U1.4 U1.11 U1.13 U1.15 U1.17 U1.18 U1.19 U1.24 U1.25 U1.26 U1.27 U1.28 U2.4 U2.5 U2.6 U2.8 U2.9 U2.10 U2.11 USB-A-3.2 USB-A-3.3 USB-A-3.5 USB-A-3.6 USB-A-3.7 USB-A-3.8 USB-A-3.9 USB-A-3.10 USB-A-3.15 W1.2 W2.2 W3.2 W4.1 W5.1 W7.1 W8.1

## Polygon pours and split planes (outlines as drawn)
GND on GND1 (split plane): 6979.9,1020.1 1020.1,1020.1 1020.1,4979.9 6979.9,4979.9
GND on GND2 (split plane): 6979.9,1020.1 1020.1,1020.1 1020.1,4979.9 6979.9,4979.9

## Silkscreen, mask and mechanical layers (free items; w line width, h text height)
Top Overlay:
  text "Weather Station" at 6715,1545 h60 r90
  text "By Sahana & Sanika" at 6850,1525 h60 r90
Mechanical 1:
  lines w10: 990,2345 2170,2345 2170,3925 1025,3925 ; 1000,1005 1005,1000 ; 6995,1000 7000,1005
Mechanical 15:
  lines w30: 1000,1005 1000,5000 7000,5000 7000,1005 ; 1005,1000 6995,1000

## Text inside footprints (layer, text, board x,y; h text height)
Debugger1: Top Overlay "2" at 4700,4260 h50 r90; Top Overlay "1" at 4800,4260 h50 r90; Top Overlay "9" at 4800,4800 h50 r90; Top Overlay "10" at 4700,4800 h50 r90